# EAGLE board mobo_v0.1_6-20-18 (EAGLE 6.6.0)
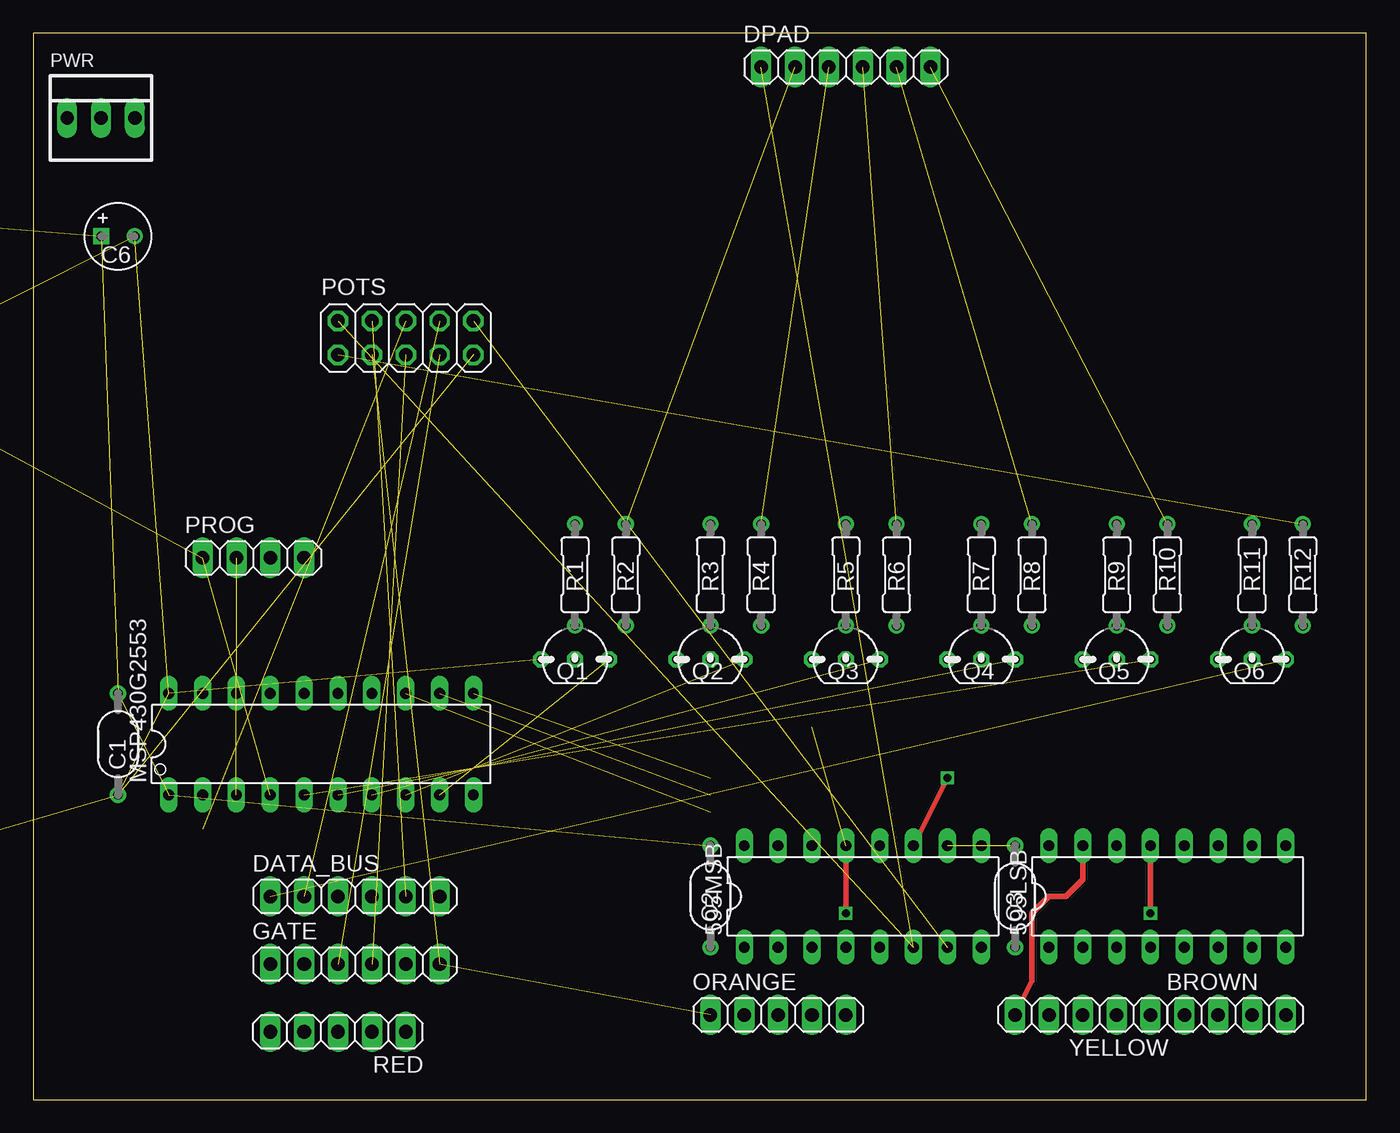
[diagram p0: board, top side]
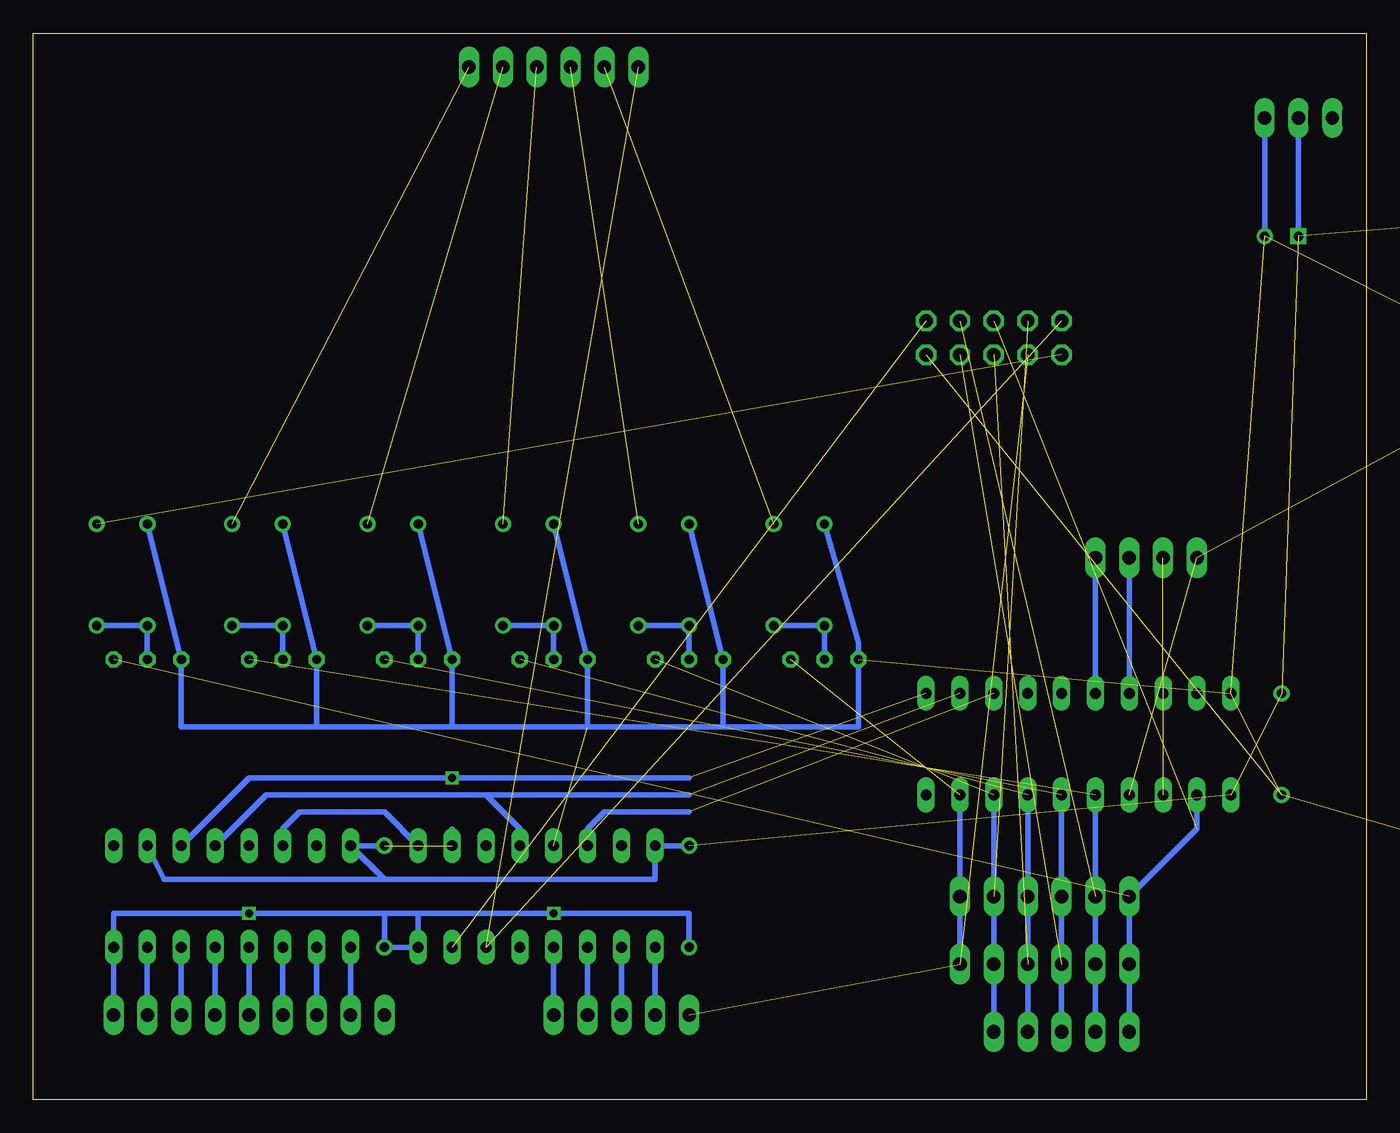
[diagram p1: board, bottom side, seen from below]

Size 100 x 80 mm. Coordinates in mm from the lower left corner, seen from the top.
Outline: 0,0 100,0 100,80 0,80 0,0
Copper layers (1*16): Top 0.035mm / dielectric 1.5mm / Bottom 0.035mm
Design rules "default": minimum track width 10mil, minimum drill 24mil, track to track 8mil, track to pad 8mil, pad to pad 8mil, via to via 8mil, smd to smd 8mil, copper to edge 40mil, drill to drill 8mil, minimum pad ring 10mil, minimum via ring 8mil, stop-mask expansion 4mil, vias tented up to drill 0mil, thermal gap 10mil

## Footprints (pad centres in the part's own frame; a part is rotated, then mirrored left to right if it is on the bottom)
DIL16 = drill 0.813 long: 1 -8.89,-3.81; 2 -6.35,-3.81; 3 -3.81,-3.81; 4 -1.27,-3.81; 5 1.27,-3.81; 6 3.81,-3.81; 7 6.35,-3.81; 8 8.89,-3.81; 9 8.89,3.81; 10 6.35,3.81; 11 3.81,3.81; 12 1.27,3.81; 13 -1.27,3.81; 14 -3.81,3.81; 15 -6.35,3.81; 16 -8.89,3.81
1X04 = drill 1.016 long: 1 -3.81,0; 2 -1.27,0; 3 1.27,0; 4 3.81,0
050X030_050_3 = drill 0.7: 1 -3.81,0; 2 3.81,0
050_020_1 = drill 0.7 square: + -1.27,0 | drill 0.7: - 1.27,0
1X06 = drill 1.016 long: 1 -6.35,0; 2 -3.81,0; 3 -1.27,0; 4 1.27,0; 5 3.81,0; 6 6.35,0
LED3MM = drill 0.9: A -1.27,0 | drill 0.9 square: K 1.27,0
1X05 = drill 1.016 long: 1 -5.08,0; 2 -2.54,0; 3 0,0; 4 2.54,0; 5 5.08,0
N20 = drill 0.813 long: 1 -11.435,-3.81; 2 -8.895,-3.81; 3 -6.355,-3.81; 4 -3.815,-3.81; 5 -1.275,-3.81; 6 1.265,-3.81; 7 3.805,-3.81; 8 6.345,-3.81; 9 8.885,-3.81; 10 11.425,-3.81; 11 11.425,3.81; 12 8.885,3.81; 13 6.345,3.81; 14 3.805,3.81; 15 1.265,3.81; 16 -1.275,3.81; 17 -3.815,3.81; 18 -6.355,3.81; 19 -8.895,3.81; 20 -11.435,3.81
MAB5SH = drill 1.321 octagon: 1 7.62,5.08; 3 -7.62,5.08; 4 5.08,7.62; 5 -5.08,7.62; PE -2.54,-5.08; PE@ 2.54,-5.08 | drill 1.321 long: 2 0,5.08 | hole 2.794: 7.62,0; -7.62,0
2X05 = drill 1.016 octagon: 1 -5.08,-1.27; 2 -5.08,1.27; 3 -2.54,-1.27; 4 -2.54,1.27; 5 0,-1.27; 6 0,1.27; 7 2.54,-1.27; 8 2.54,1.27; 9 5.08,-1.27; 10 5.08,1.27
22-23-2031 = drill 1 long: 1 -2.54,0; 2 0,0; 3 2.54,0
TO92- = drill 0.7 octagon: 1 2.54,0; 2 0,0; 3 -2.54,0
R0207/3 = drill 0.7: 1 -3.81,0; 2 3.81,0

## Placement (x,y rotation side)
595LSB  74LS595N  [DIL16]  85.09,15.24 0 top
595MSB  74LS595N  [DIL16]  62.23,15.24 0 top
BROWN  [1X04]  90.17,6.35 0 top
C1  100n  [050X030_050_3]  6.35,26.67 90 top
C2  100n  [050X030_050_3]  50.8,15.24 90 top
C3  100n  [050X030_050_3]  73.66,15.24 90 top
C6  [050_020_1]  6.35,64.77 0 top
DATA_BUS  [1X06]  24.13,15.24 0 top
DPAD  [1X06]  60.96,77.47 0 top
GATE  [1X06]  24.13,10.16 0 top
LED1  LED3MM  [LED3MM]  -38.1,67.31 0 top  (outside the outline)
MIDI_OUT  [1X05]  -20.32,49.53 0 top  (outside the outline)
MSP430G2553  G2XX3---N20  [N20]  21.59,26.67 0 top
MTX  MAB5SH  [MAB5SH]  -24.13,8.89 0 top  (outside the outline)
ORANGE  [1X05]  55.88,6.35 0 top
POTS  [2X05]  27.94,57.15 0 top
PROG  [1X04]  16.51,40.64 0 top
PWR  22-23-2031  [22-23-2031]  5.08,73.66 0 top
Q1  2N3904  [TO92-]  40.64,33.02 0 top
Q2  2N3904  [TO92-]  50.8,33.02 0 top
Q3  2N3904  [TO92-]  60.96,33.02 0 top
Q4  2N3904  [TO92-]  71.12,33.02 0 top
Q5  2N3904  [TO92-]  81.28,33.02 0 top
Q6  2N3904  [TO92-]  91.44,33.02 0 top
R1  300k  [R0207/3]  40.64,39.37 90 top
R2  1k  [R0207/3]  44.45,39.37 90 top
R3  300k  [R0207/3]  50.8,39.37 90 top
R4  1k  [R0207/3]  54.61,39.37 90 top
R5  300k  [R0207/3]  60.96,39.37 90 top
R6  1k  [R0207/3]  64.77,39.37 90 top
R7  300k  [R0207/3]  71.12,39.37 90 top
R8  1k  [R0207/3]  74.93,39.37 90 top
R9  300k  [R0207/3]  81.28,39.37 90 top
R10  1k  [R0207/3]  85.09,39.37 90 top
R11  300k  [R0207/3]  91.44,39.37 90 top
R12  1k  [R0207/3]  95.25,39.37 90 top
R13  47R  [R0207/3]  -45.72,68.58 0 top  (outside the outline)
R14  47R  [R0207/3]  -55.88,68.58 0 top  (outside the outline)
R15  120R  [R0207/3]  -66.04,68.58 0 top  (outside the outline)
RED  [1X05]  22.86,5.08 180 top
YELLOW  [1X05]  78.74,6.35 180 top

## Library data of the parts
595LSB 595MSB = 74xx-us
BROWN DATA_BUS DPAD GATE MIDI_OUT ORANGE POTS PROG RED YELLOW = pinhead
C1-C3 = gm-caps-ceramic
C6 = gm-caps-electro-pol
LED1 = gm-diodes
MSP430G2553 = TI_MSP430_v16
MTX = jaapie; OC_FARNELL: 809883; OC_NEWARK: unknown
PWR = jaapie; MF: MOLEX; MPN: 22-23-2031; OC_FARNELL: 1462950; OC_NEWARK: 30C0862
Q1-Q6 = gm-trans
R1-R15 = gm-resistors

## Nets
_RST: MSP430G2553.16 PROG.4
ANALOG_CTL: 595MSB.7 POTS.10
BUTTON_CTL: 595MSB.6 DPAD.1 POTS.2
CTL_C: 595MSB.15
D0: DATA_BUS.1 GATE.1 MSP430G2553.2 POTS.6 Q6.1 RED.5
D1: DATA_BUS.2 GATE.2 MSP430G2553.5 POTS.8 Q5.1 RED.4
D2: DATA_BUS.3 GATE.3 MSP430G2553.6 POTS.7 Q4.1 RED.3
D3: DATA_BUS.4 GATE.4 MSP430G2553.7 POTS.5 Q3.1 RED.2
D4: DATA_BUS.5 GATE.5 MSP430G2553.8 POTS.4 Q2.1 RED.1
D5: DATA_BUS.6 GATE.6 MSP430G2553.9 ORANGE.1 POTS.3 Q1.1
D_DOWN: DPAD.6 R10.2
D_LEFT: DPAD.5 R8.2
D_RIGHT: DPAD.4 R6.2
D_UP: DPAD.3 R4.2
GATE_CTL: 595MSB.5
GND: 595LSB.8 595LSB.13 595MSB.8 595MSB.13 BROWN.4 C1.1 C2.1 C3.1 C6.- MIDI_OUT.2 MSP430G2553.20 MTX.2 POTS.9 PWR.3 Q1.3 Q2.3 Q3.3 Q4.3 Q5.3 Q6.3 R1.2 R3.2 R5.2 R7.2 R9.2 R11.2
M_F1: 595LSB.1 YELLOW.4
M_F2: 595LSB.2 YELLOW.3
M_F3: 595LSB.3 YELLOW.2
M_F4: 595LSB.4 YELLOW.1
M_F5: 595MSB.4 ORANGE.5
M_F6: 595MSB.3 ORANGE.4
M_F7: 595MSB.2 ORANGE.3
M_F8: 595MSB.1 ORANGE.2
M_F9: 595LSB.7 BROWN.3
M_F10: 595LSB.15 YELLOW.5
M_F11: 595LSB.6 BROWN.2
M_F12: 595LSB.5 BROWN.1
MIDI_OUT+: MIDI_OUT.4 MTX.4 R13.1
MIDI_OUT-: MIDI_OUT.5 MTX.5 R14.1
N$1: Q6.2 R11.1 R12.1
N$2: 595LSB.14 595MSB.9
N$6: LED1.A R15.1
N$13: Q1.2 R1.1 R2.1
N$14: Q2.2 R3.1 R4.1
N$15: Q3.2 R5.1 R6.1
N$16: Q4.2 R7.1 R8.1
N$17: Q5.2 R9.1 R10.1
PE: MTX.PE MTX.PE@
RCK: 595LSB.12 595MSB.12 MSP430G2553.12
RXD: MSP430G2553.3 PROG.2
SB_2: POTS.1 R12.2
SCK: 595LSB.11 595MSB.11 MSP430G2553.11
SER: 595MSB.14 MSP430G2553.13
TEST: MSP430G2553.17 PROG.3
TXD: LED1.K MSP430G2553.4 PROG.1 R14.2
VA: 595LSB.10 595LSB.16 595MSB.10 595MSB.16 C1.2 C2.2 C3.2 C6.+ MSP430G2553.1 PWR.2 R13.2 R15.2
VB: PWR.1
X_BUTTON: DPAD.2 R2.2

## Tracks (layer width: path | path; a pad name or v marks a point on that pad's centre or on a via)
_RST
  Bottom 0.406: PROG.4 MSP430G2553.16
ANALOG_CTL  (1 unrouted)
BUTTON_CTL  (2 unrouted)
D0  (2 unrouted)
  Bottom 0.406: RED.5 GATE.1 DATA_BUS.1 12.7,20.32 MSP430G2553.2
D1  (2 unrouted)
  Bottom 0.406: MSP430G2553.5 DATA_BUS.2 GATE.2 RED.4
D2  (2 unrouted)
  Bottom 0.406: MSP430G2553.6 DATA_BUS.3 GATE.3 RED.3
D3  (2 unrouted)
  Bottom 0.406: RED.2 GATE.4 DATA_BUS.4 MSP430G2553.7
D4  (2 unrouted)
  Bottom 0.406: MSP430G2553.8 DATA_BUS.5 GATE.5 RED.1
D5  (3 unrouted)
  Bottom 0.406: GATE.6 DATA_BUS.6 MSP430G2553.9
D_DOWN  (1 unrouted)
D_LEFT  (1 unrouted)
D_RIGHT  (1 unrouted)
D_UP  (1 unrouted)
GND  (via drill 0.6)  (7 unrouted)
  Top 0.406: 595MSB.13 v60.96,13.97 | 595LSB.13 v83.82,13.97
  Bottom 0.406: BROWN.4 595LSB.8 93.98,13.97 v83.82,13.97 73.66,13.97 | R11.2 Q6.3 88.9,27.94 78.74,27.94 | R9.2 Q5.3 78.74,27.94 | R7.2 Q4.3 68.58,27.94 | R1.2 38.1,34.29 Q1.3 38.1,27.94 48.26,27.94 | R3.2 Q2.3 48.26,27.94 | R5.2 Q3.3 58.42,27.94 | PWR.3 C6.- | 58.42,27.94 48.26,27.94 | 78.74,27.94 68.58,27.94 | 68.58,27.94 58.42,27.94 | C2.1 50.8,13.97 v60.96,13.97 71.12,13.97 | 71.12,13.97 73.66,13.97 | 73.66,13.97 C3.1 595MSB.8 71.12,13.97
M_F1
  Bottom 0.406: YELLOW.4 595LSB.1
M_F2
  Bottom 0.406: 595LSB.2 YELLOW.3
M_F3
  Bottom 0.406: YELLOW.2 595LSB.3
M_F4
  Bottom 0.406: 595LSB.4 YELLOW.1
M_F5
  Bottom 0.406: 595MSB.4 ORANGE.5
M_F6
  Bottom 0.406: ORANGE.4 595MSB.3
M_F7
  Bottom 0.406: ORANGE.3 595MSB.2
M_F8
  Bottom 0.406: ORANGE.2 595MSB.1
M_F9
  Bottom 0.406: BROWN.3 595LSB.7
M_F10
  Top 0.406: 595LSB.15 78.74,16.51 77.47,15.24 76.2,15.24 74.93,13.97 74.93,8.89 YELLOW.5
M_F11
  Bottom 0.406: 595LSB.6 BROWN.2
M_F12
  Bottom 0.406: BROWN.1 595LSB.5
MIDI_OUT+  (2 unrouted)
MIDI_OUT-  (2 unrouted)
N$1
  Bottom 0.406: R12.1 R11.1 Q6.2
N$2
  Bottom 0.406: 595MSB.9 73.66,21.59 80.01,21.59 81.28,20.32 595LSB.14
N$6  (1 unrouted)
N$13
  Bottom 0.406: R2.1 R1.1 Q1.2
N$14
  Bottom 0.406: R4.1 R3.1 Q2.2
N$15
  Bottom 0.406: R6.1 R5.1 Q3.2
N$16
  Bottom 0.406: R8.1 R7.1 Q4.2
N$17
  Bottom 0.406: R10.1 R9.1 Q5.2
PE  (1 unrouted)
RCK  (1 unrouted)
  Bottom 0.406: 595MSB.12 63.5,20.32 66.04,22.86 | 595LSB.12 82.55,22.86 66.04,22.86 | 66.04,22.86 50.8,22.86
RXD  (1 unrouted)
SB_2  (1 unrouted)
SCK  (via drill 0.6)  (1 unrouted)
  Top 0.406: 595MSB.11 v68.58,24.13
  Bottom 0.406: 595LSB.11 83.82,24.13 v68.58,24.13 50.8,24.13
SER  (1 unrouted)
  Bottom 0.406: 595MSB.14 58.42,20.32 57.15,21.59 50.8,21.59
TEST
  Bottom 0.406: PROG.3 MSP430G2553.17
TXD  (3 unrouted)
VA  (6 unrouted)
  Bottom 0.406: C2.2 595MSB.16 53.34,16.51 73.66,16.51 | C3.2 595LSB.16 73.66,16.51 | PWR.2 C6.+ | 73.66,16.51 90.17,16.51 595LSB.10 | 595MSB.10 68.58,20.32
X_BUTTON  (1 unrouted)